# Altium PCB ProPrj_HTXStudio_OneHanded_Keyboard.PcbDoc (part 4 of 11)
Units mm, origin at the board's own origin, x right, y up, seen from the top; angles counter-clockwise.
Board outline 152.4 x 101.6 mm, 20 copper layers (F.Cu, F.Mask, B.Cu, B.Mask, In1.Cu, F.SilkS, In2.Cu, B.SilkS, F.Adhes, B.Adhes, F.Paste, B.Paste, Dwgs.User, Cmts.User, Eco1.User, Eco2.User, Edge.Cuts, Margin, B.CrtYd, F.CrtYd); 269 components, 0 nets, 747 pads, 1168 vias.
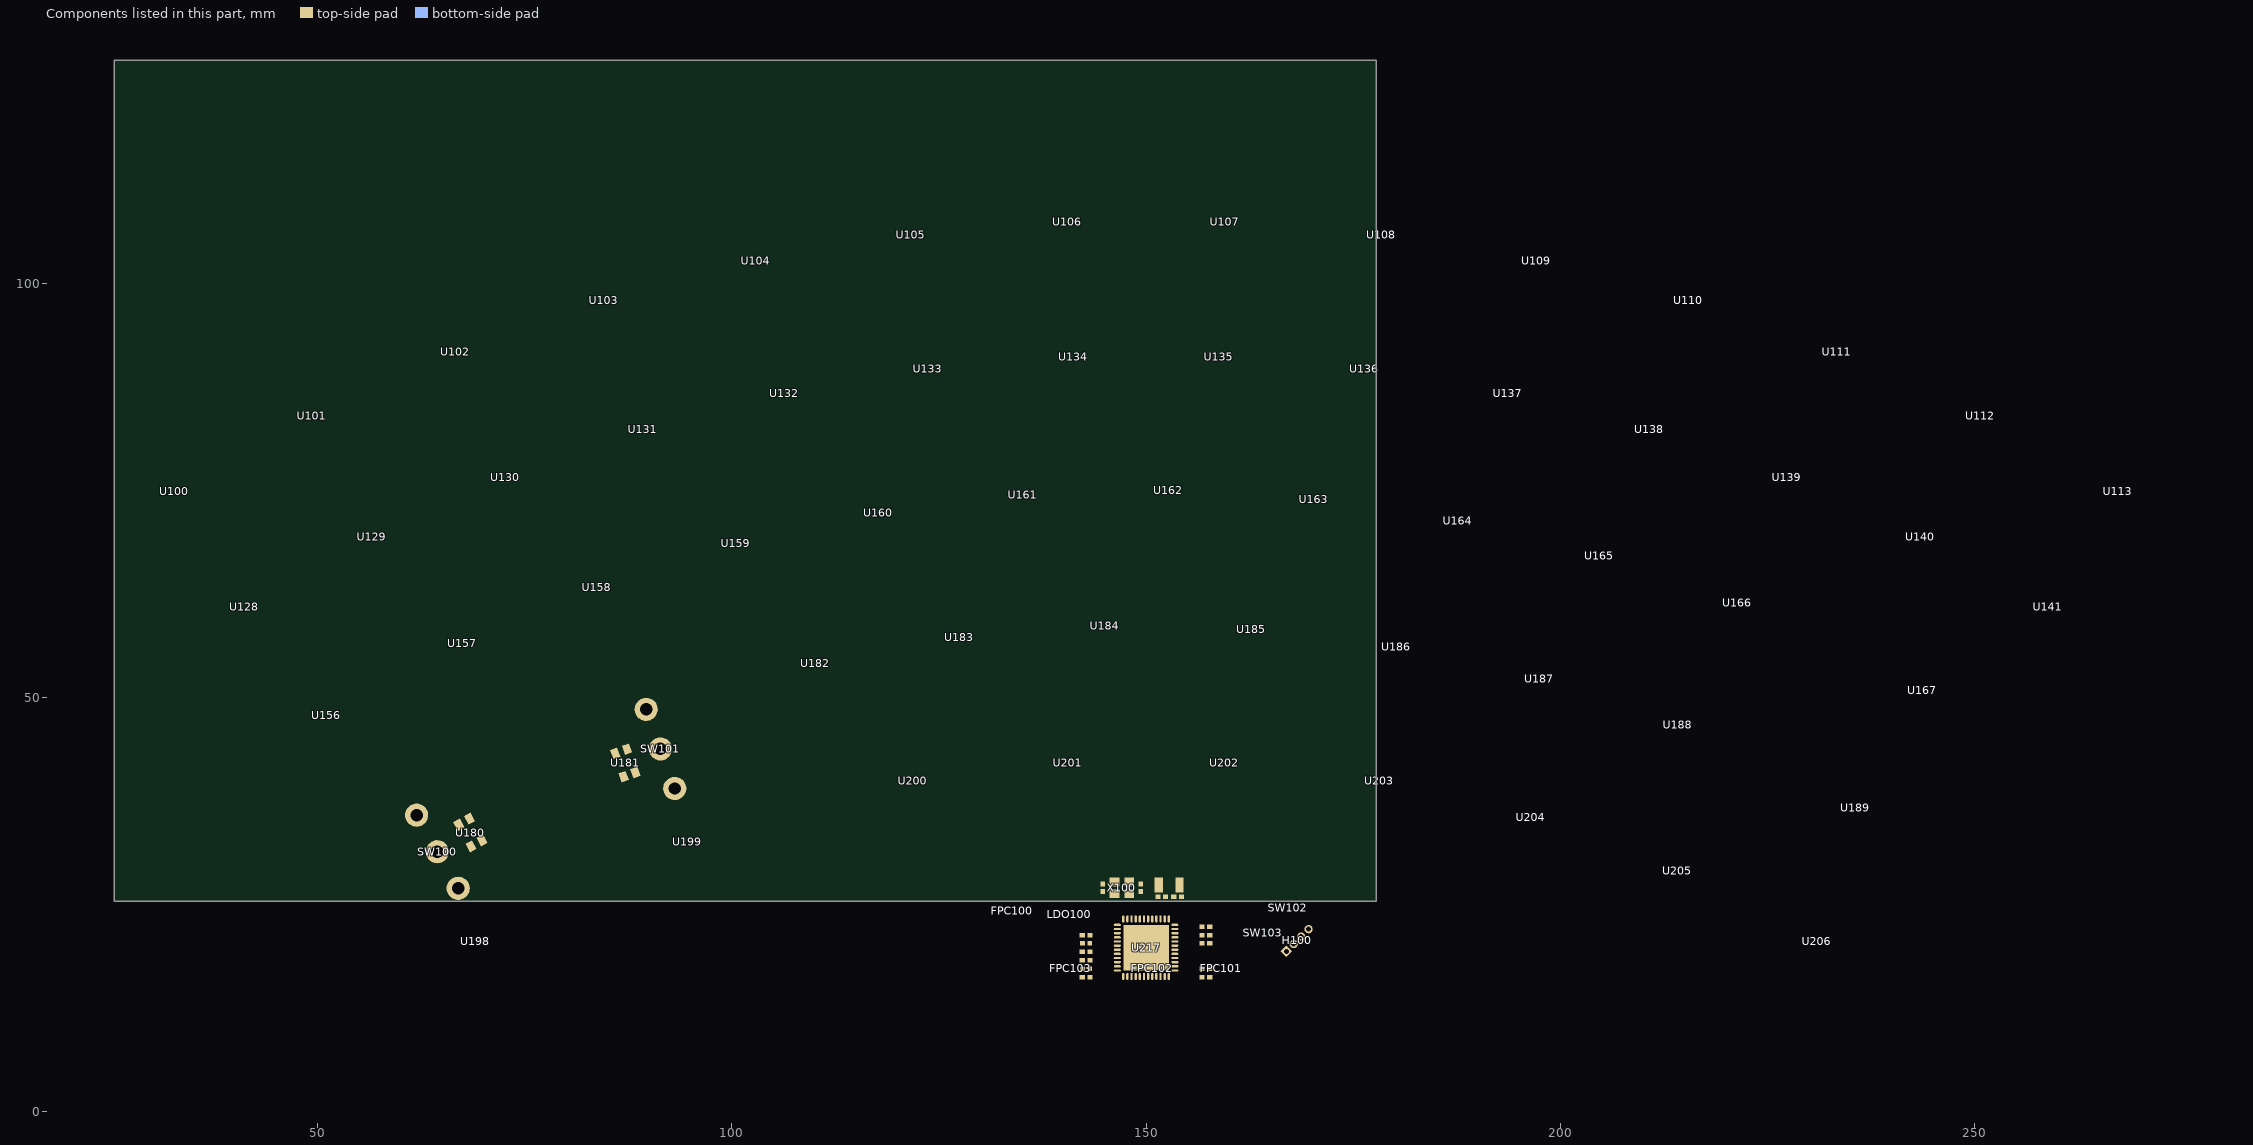
[diagram p16: the components of this part, seen from the top]

## Design rules (kind name [scope] priority, off if disabled: settings) (continued)
PolygonConnect Polygon_B.Cu--158_ConnectRelief90 [IsNamedPolygon('B.Cu--158') vs (IsThruPin or IsSMTPin) and (PadShape_AllLayers <> 'Round')] p600: connectstyle=Relief reliefconductorwidth=0.254 reliefentries=4 polygonreliefangle="90 Angle" airgapwidth=0.254
PolygonConnect Polygon_B.Cu--157_ConnectDirect [IsNamedPolygon('B.Cu--157') vs IsVia] p601: connectstyle=Direct reliefconductorwidth=0.254 reliefentries=4 polygonreliefangle="90 Angle" airgapwidth=0.254
PolygonConnect Polygon_B.Cu--157_ConnectRelief45 [IsNamedPolygon('B.Cu--157') vs (IsThruPin or IsSMTPin) and (PadShape_AllLayers = 'Round')] p602: connectstyle=Relief reliefconductorwidth=0.254 reliefentries=4 polygonreliefangle="45 Angle" airgapwidth=0.254
PolygonConnect Polygon_B.Cu--157_ConnectRelief90 [IsNamedPolygon('B.Cu--157') vs (IsThruPin or IsSMTPin) and (PadShape_AllLayers <> 'Round')] p603: connectstyle=Relief reliefconductorwidth=0.254 reliefentries=4 polygonreliefangle="90 Angle" airgapwidth=0.254
PolygonConnect Polygon_B.Cu--156_ConnectDirect [IsNamedPolygon('B.Cu--156') vs IsVia] p604: connectstyle=Direct reliefconductorwidth=0.254 reliefentries=4 polygonreliefangle="90 Angle" airgapwidth=0.254
PolygonConnect Polygon_B.Cu--156_ConnectRelief45 [IsNamedPolygon('B.Cu--156') vs (IsThruPin or IsSMTPin) and (PadShape_AllLayers = 'Round')] p605: connectstyle=Relief reliefconductorwidth=0.254 reliefentries=4 polygonreliefangle="45 Angle" airgapwidth=0.254
PolygonConnect Polygon_B.Cu--156_ConnectRelief90 [IsNamedPolygon('B.Cu--156') vs (IsThruPin or IsSMTPin) and (PadShape_AllLayers <> 'Round')] p606: connectstyle=Relief reliefconductorwidth=0.254 reliefentries=4 polygonreliefangle="90 Angle" airgapwidth=0.254
PolygonConnect Polygon_B.Cu--155_ConnectDirect [IsNamedPolygon('B.Cu--155') vs IsVia] p607: connectstyle=Direct reliefconductorwidth=0.254 reliefentries=4 polygonreliefangle="90 Angle" airgapwidth=0.254
PolygonConnect Polygon_B.Cu--155_ConnectRelief45 [IsNamedPolygon('B.Cu--155') vs (IsThruPin or IsSMTPin) and (PadShape_AllLayers = 'Round')] p608: connectstyle=Relief reliefconductorwidth=0.254 reliefentries=4 polygonreliefangle="45 Angle" airgapwidth=0.254
PolygonConnect Polygon_B.Cu--155_ConnectRelief90 [IsNamedPolygon('B.Cu--155') vs (IsThruPin or IsSMTPin) and (PadShape_AllLayers <> 'Round')] p609: connectstyle=Relief reliefconductorwidth=0.254 reliefentries=4 polygonreliefangle="90 Angle" airgapwidth=0.254
PolygonConnect Polygon_B.Cu--154_ConnectDirect [IsNamedPolygon('B.Cu--154') vs IsVia] p610: connectstyle=Direct reliefconductorwidth=0.254 reliefentries=4 polygonreliefangle="90 Angle" airgapwidth=0.254
PolygonConnect Polygon_B.Cu--154_ConnectRelief45 [IsNamedPolygon('B.Cu--154') vs (IsThruPin or IsSMTPin) and (PadShape_AllLayers = 'Round')] p611: connectstyle=Relief reliefconductorwidth=0.254 reliefentries=4 polygonreliefangle="45 Angle" airgapwidth=0.254
PolygonConnect Polygon_B.Cu--154_ConnectRelief90 [IsNamedPolygon('B.Cu--154') vs (IsThruPin or IsSMTPin) and (PadShape_AllLayers <> 'Round')] p612: connectstyle=Relief reliefconductorwidth=0.254 reliefentries=4 polygonreliefangle="90 Angle" airgapwidth=0.254
PolygonConnect Polygon_B.Cu--153_ConnectDirect [IsNamedPolygon('B.Cu--153') vs IsVia] p613: connectstyle=Direct reliefconductorwidth=0.254 reliefentries=4 polygonreliefangle="90 Angle" airgapwidth=0.254
PolygonConnect Polygon_B.Cu--153_ConnectRelief45 [IsNamedPolygon('B.Cu--153') vs (IsThruPin or IsSMTPin) and (PadShape_AllLayers = 'Round')] p614: connectstyle=Relief reliefconductorwidth=0.254 reliefentries=4 polygonreliefangle="45 Angle" airgapwidth=0.254
PolygonConnect Polygon_B.Cu--153_ConnectRelief90 [IsNamedPolygon('B.Cu--153') vs (IsThruPin or IsSMTPin) and (PadShape_AllLayers <> 'Round')] p615: connectstyle=Relief reliefconductorwidth=0.254 reliefentries=4 polygonreliefangle="90 Angle" airgapwidth=0.254
PolygonConnect Polygon_B.Cu--152_ConnectDirect [IsNamedPolygon('B.Cu--152') vs IsVia] p616: connectstyle=Direct reliefconductorwidth=0.254 reliefentries=4 polygonreliefangle="90 Angle" airgapwidth=0.254
PolygonConnect Polygon_B.Cu--152_ConnectRelief45 [IsNamedPolygon('B.Cu--152') vs (IsThruPin or IsSMTPin) and (PadShape_AllLayers = 'Round')] p617: connectstyle=Relief reliefconductorwidth=0.254 reliefentries=4 polygonreliefangle="45 Angle" airgapwidth=0.254
PolygonConnect Polygon_B.Cu--152_ConnectRelief90 [IsNamedPolygon('B.Cu--152') vs (IsThruPin or IsSMTPin) and (PadShape_AllLayers <> 'Round')] p618: connectstyle=Relief reliefconductorwidth=0.254 reliefentries=4 polygonreliefangle="90 Angle" airgapwidth=0.254
PolygonConnect Polygon_B.Cu--151_ConnectDirect [IsNamedPolygon('B.Cu--151') vs IsVia] p619: connectstyle=Direct reliefconductorwidth=0.254 reliefentries=4 polygonreliefangle="90 Angle" airgapwidth=0.254
PolygonConnect Polygon_B.Cu--151_ConnectRelief45 [IsNamedPolygon('B.Cu--151') vs (IsThruPin or IsSMTPin) and (PadShape_AllLayers = 'Round')] p620: connectstyle=Relief reliefconductorwidth=0.254 reliefentries=4 polygonreliefangle="45 Angle" airgapwidth=0.254
PolygonConnect Polygon_B.Cu--151_ConnectRelief90 [IsNamedPolygon('B.Cu--151') vs (IsThruPin or IsSMTPin) and (PadShape_AllLayers <> 'Round')] p621: connectstyle=Relief reliefconductorwidth=0.254 reliefentries=4 polygonreliefangle="90 Angle" airgapwidth=0.254
PolygonConnect Polygon_B.Cu--150_ConnectDirect [IsNamedPolygon('B.Cu--150') vs IsVia] p622: connectstyle=Direct reliefconductorwidth=0.254 reliefentries=4 polygonreliefangle="90 Angle" airgapwidth=0.254
PolygonConnect Polygon_B.Cu--150_ConnectRelief45 [IsNamedPolygon('B.Cu--150') vs (IsThruPin or IsSMTPin) and (PadShape_AllLayers = 'Round')] p623: connectstyle=Relief reliefconductorwidth=0.254 reliefentries=4 polygonreliefangle="45 Angle" airgapwidth=0.254
PolygonConnect Polygon_B.Cu--150_ConnectRelief90 [IsNamedPolygon('B.Cu--150') vs (IsThruPin or IsSMTPin) and (PadShape_AllLayers <> 'Round')] p624: connectstyle=Relief reliefconductorwidth=0.254 reliefentries=4 polygonreliefangle="90 Angle" airgapwidth=0.254
PolygonConnect Polygon_B.Cu--149_ConnectDirect [IsNamedPolygon('B.Cu--149') vs IsVia] p625: connectstyle=Direct reliefconductorwidth=0.254 reliefentries=4 polygonreliefangle="90 Angle" airgapwidth=0.254
PolygonConnect Polygon_B.Cu--149_ConnectRelief45 [IsNamedPolygon('B.Cu--149') vs (IsThruPin or IsSMTPin) and (PadShape_AllLayers = 'Round')] p626: connectstyle=Relief reliefconductorwidth=0.254 reliefentries=4 polygonreliefangle="45 Angle" airgapwidth=0.254
PolygonConnect Polygon_B.Cu--149_ConnectRelief90 [IsNamedPolygon('B.Cu--149') vs (IsThruPin or IsSMTPin) and (PadShape_AllLayers <> 'Round')] p627: connectstyle=Relief reliefconductorwidth=0.254 reliefentries=4 polygonreliefangle="90 Angle" airgapwidth=0.254
PolygonConnect Polygon_B.Cu--148_ConnectDirect [IsNamedPolygon('B.Cu--148') vs IsVia] p628: connectstyle=Direct reliefconductorwidth=0.254 reliefentries=4 polygonreliefangle="90 Angle" airgapwidth=0.254
PolygonConnect Polygon_B.Cu--148_ConnectRelief45 [IsNamedPolygon('B.Cu--148') vs (IsThruPin or IsSMTPin) and (PadShape_AllLayers = 'Round')] p629: connectstyle=Relief reliefconductorwidth=0.254 reliefentries=4 polygonreliefangle="45 Angle" airgapwidth=0.254
PolygonConnect Polygon_B.Cu--148_ConnectRelief90 [IsNamedPolygon('B.Cu--148') vs (IsThruPin or IsSMTPin) and (PadShape_AllLayers <> 'Round')] p630: connectstyle=Relief reliefconductorwidth=0.254 reliefentries=4 polygonreliefangle="90 Angle" airgapwidth=0.254
PolygonConnect Polygon_B.Cu--147_ConnectDirect [IsNamedPolygon('B.Cu--147') vs IsVia] p631: connectstyle=Direct reliefconductorwidth=0.254 reliefentries=4 polygonreliefangle="90 Angle" airgapwidth=0.254
PolygonConnect Polygon_B.Cu--147_ConnectRelief45 [IsNamedPolygon('B.Cu--147') vs (IsThruPin or IsSMTPin) and (PadShape_AllLayers = 'Round')] p632: connectstyle=Relief reliefconductorwidth=0.254 reliefentries=4 polygonreliefangle="45 Angle" airgapwidth=0.254
PolygonConnect Polygon_B.Cu--147_ConnectRelief90 [IsNamedPolygon('B.Cu--147') vs (IsThruPin or IsSMTPin) and (PadShape_AllLayers <> 'Round')] p633: connectstyle=Relief reliefconductorwidth=0.254 reliefentries=4 polygonreliefangle="90 Angle" airgapwidth=0.254
PolygonConnect Polygon_B.Cu--146_ConnectDirect [IsNamedPolygon('B.Cu--146') vs IsVia] p634: connectstyle=Direct reliefconductorwidth=0.254 reliefentries=4 polygonreliefangle="90 Angle" airgapwidth=0.254
PolygonConnect Polygon_B.Cu--146_ConnectRelief45 [IsNamedPolygon('B.Cu--146') vs (IsThruPin or IsSMTPin) and (PadShape_AllLayers = 'Round')] p635: connectstyle=Relief reliefconductorwidth=0.254 reliefentries=4 polygonreliefangle="45 Angle" airgapwidth=0.254
PolygonConnect Polygon_B.Cu--146_ConnectRelief90 [IsNamedPolygon('B.Cu--146') vs (IsThruPin or IsSMTPin) and (PadShape_AllLayers <> 'Round')] p636: connectstyle=Relief reliefconductorwidth=0.254 reliefentries=4 polygonreliefangle="90 Angle" airgapwidth=0.254
PolygonConnect Polygon_B.Cu--145_ConnectDirect [IsNamedPolygon('B.Cu--145') vs IsVia] p637: connectstyle=Direct reliefconductorwidth=0.254 reliefentries=4 polygonreliefangle="90 Angle" airgapwidth=0.254
PolygonConnect Polygon_B.Cu--145_ConnectRelief45 [IsNamedPolygon('B.Cu--145') vs (IsThruPin or IsSMTPin) and (PadShape_AllLayers = 'Round')] p638: connectstyle=Relief reliefconductorwidth=0.254 reliefentries=4 polygonreliefangle="45 Angle" airgapwidth=0.254
PolygonConnect Polygon_B.Cu--145_ConnectRelief90 [IsNamedPolygon('B.Cu--145') vs (IsThruPin or IsSMTPin) and (PadShape_AllLayers <> 'Round')] p639: connectstyle=Relief reliefconductorwidth=0.254 reliefentries=4 polygonreliefangle="90 Angle" airgapwidth=0.254
PolygonConnect Polygon_B.Cu--144_ConnectDirect [IsNamedPolygon('B.Cu--144') vs IsVia] p640: connectstyle=Direct reliefconductorwidth=0.254 reliefentries=4 polygonreliefangle="90 Angle" airgapwidth=0.254
PolygonConnect Polygon_B.Cu--144_ConnectRelief45 [IsNamedPolygon('B.Cu--144') vs (IsThruPin or IsSMTPin) and (PadShape_AllLayers = 'Round')] p641: connectstyle=Relief reliefconductorwidth=0.254 reliefentries=4 polygonreliefangle="45 Angle" airgapwidth=0.254
PolygonConnect Polygon_B.Cu--144_ConnectRelief90 [IsNamedPolygon('B.Cu--144') vs (IsThruPin or IsSMTPin) and (PadShape_AllLayers <> 'Round')] p642: connectstyle=Relief reliefconductorwidth=0.254 reliefentries=4 polygonreliefangle="90 Angle" airgapwidth=0.254
PolygonConnect Polygon_B.Cu--143_ConnectDirect [IsNamedPolygon('B.Cu--143') vs IsVia] p643: connectstyle=Direct reliefconductorwidth=0.254 reliefentries=4 polygonreliefangle="90 Angle" airgapwidth=0.254
PolygonConnect Polygon_B.Cu--143_ConnectRelief45 [IsNamedPolygon('B.Cu--143') vs (IsThruPin or IsSMTPin) and (PadShape_AllLayers = 'Round')] p644: connectstyle=Relief reliefconductorwidth=0.254 reliefentries=4 polygonreliefangle="45 Angle" airgapwidth=0.254
PolygonConnect Polygon_B.Cu--143_ConnectRelief90 [IsNamedPolygon('B.Cu--143') vs (IsThruPin or IsSMTPin) and (PadShape_AllLayers <> 'Round')] p645: connectstyle=Relief reliefconductorwidth=0.254 reliefentries=4 polygonreliefangle="90 Angle" airgapwidth=0.254
PolygonConnect Polygon_B.Cu--142_ConnectDirect [IsNamedPolygon('B.Cu--142') vs IsVia] p646: connectstyle=Direct reliefconductorwidth=0.254 reliefentries=4 polygonreliefangle="90 Angle" airgapwidth=0.254
PolygonConnect Polygon_B.Cu--142_ConnectRelief45 [IsNamedPolygon('B.Cu--142') vs (IsThruPin or IsSMTPin) and (PadShape_AllLayers = 'Round')] p647: connectstyle=Relief reliefconductorwidth=0.254 reliefentries=4 polygonreliefangle="45 Angle" airgapwidth=0.254
PolygonConnect Polygon_B.Cu--142_ConnectRelief90 [IsNamedPolygon('B.Cu--142') vs (IsThruPin or IsSMTPin) and (PadShape_AllLayers <> 'Round')] p648: connectstyle=Relief reliefconductorwidth=0.254 reliefentries=4 polygonreliefangle="90 Angle" airgapwidth=0.254
PolygonConnect Polygon_B.Cu--141_ConnectDirect [IsNamedPolygon('B.Cu--141') vs IsVia] p649: connectstyle=Direct reliefconductorwidth=0.254 reliefentries=4 polygonreliefangle="90 Angle" airgapwidth=0.254
PolygonConnect Polygon_B.Cu--141_ConnectRelief45 [IsNamedPolygon('B.Cu--141') vs (IsThruPin or IsSMTPin) and (PadShape_AllLayers = 'Round')] p650: connectstyle=Relief reliefconductorwidth=0.5 reliefentries=4 polygonreliefangle="45 Angle" airgapwidth=0.5
PolygonConnect Polygon_B.Cu--141_ConnectRelief90 [IsNamedPolygon('B.Cu--141') vs (IsThruPin or IsSMTPin) and (PadShape_AllLayers <> 'Round')] p651: connectstyle=Relief reliefconductorwidth=0.5 reliefentries=4 polygonreliefangle="90 Angle" airgapwidth=0.5
PolygonConnect Polygon_B.Cu--140_ConnectDirect [IsNamedPolygon('B.Cu--140') vs IsVia] p652: connectstyle=Direct reliefconductorwidth=0.254 reliefentries=4 polygonreliefangle="90 Angle" airgapwidth=0.254
PolygonConnect Polygon_B.Cu--140_ConnectRelief45 [IsNamedPolygon('B.Cu--140') vs (IsThruPin or IsSMTPin) and (PadShape_AllLayers = 'Round')] p653: connectstyle=Relief reliefconductorwidth=0.254 reliefentries=4 polygonreliefangle="45 Angle" airgapwidth=0.254
PolygonConnect Polygon_B.Cu--140_ConnectRelief90 [IsNamedPolygon('B.Cu--140') vs (IsThruPin or IsSMTPin) and (PadShape_AllLayers <> 'Round')] p654: connectstyle=Relief reliefconductorwidth=0.254 reliefentries=4 polygonreliefangle="90 Angle" airgapwidth=0.254
PolygonConnect Polygon_B.Cu--139_ConnectDirect [IsNamedPolygon('B.Cu--139') vs IsVia] p655: connectstyle=Direct reliefconductorwidth=0.254 reliefentries=4 polygonreliefangle="90 Angle" airgapwidth=0.254
PolygonConnect Polygon_B.Cu--139_ConnectRelief45 [IsNamedPolygon('B.Cu--139') vs (IsThruPin or IsSMTPin) and (PadShape_AllLayers = 'Round')] p656: connectstyle=Relief reliefconductorwidth=0.254 reliefentries=4 polygonreliefangle="45 Angle" airgapwidth=0.254
PolygonConnect Polygon_B.Cu--139_ConnectRelief90 [IsNamedPolygon('B.Cu--139') vs (IsThruPin or IsSMTPin) and (PadShape_AllLayers <> 'Round')] p657: connectstyle=Relief reliefconductorwidth=0.254 reliefentries=4 polygonreliefangle="90 Angle" airgapwidth=0.254
PolygonConnect Polygon_B.Cu--138_ConnectDirect [IsNamedPolygon('B.Cu--138') vs IsVia] p658: connectstyle=Direct reliefconductorwidth=0.254 reliefentries=4 polygonreliefangle="90 Angle" airgapwidth=0.254
PolygonConnect Polygon_B.Cu--138_ConnectRelief45 [IsNamedPolygon('B.Cu--138') vs (IsThruPin or IsSMTPin) and (PadShape_AllLayers = 'Round')] p659: connectstyle=Relief reliefconductorwidth=0.254 reliefentries=4 polygonreliefangle="45 Angle" airgapwidth=0.254
PolygonConnect Polygon_B.Cu--138_ConnectRelief90 [IsNamedPolygon('B.Cu--138') vs (IsThruPin or IsSMTPin) and (PadShape_AllLayers <> 'Round')] p660: connectstyle=Relief reliefconductorwidth=0.254 reliefentries=4 polygonreliefangle="90 Angle" airgapwidth=0.254
PolygonConnect Polygon_B.Cu--137_ConnectDirect [IsNamedPolygon('B.Cu--137') vs IsVia] p661: connectstyle=Direct reliefconductorwidth=0.254 reliefentries=4 polygonreliefangle="90 Angle" airgapwidth=0.254
PolygonConnect Polygon_B.Cu--137_ConnectRelief45 [IsNamedPolygon('B.Cu--137') vs (IsThruPin or IsSMTPin) and (PadShape_AllLayers = 'Round')] p662: connectstyle=Relief reliefconductorwidth=0.254 reliefentries=4 polygonreliefangle="45 Angle" airgapwidth=0.254
PolygonConnect Polygon_B.Cu--137_ConnectRelief90 [IsNamedPolygon('B.Cu--137') vs (IsThruPin or IsSMTPin) and (PadShape_AllLayers <> 'Round')] p663: connectstyle=Relief reliefconductorwidth=0.254 reliefentries=4 polygonreliefangle="90 Angle" airgapwidth=0.254
PolygonConnect Polygon_B.Cu--136_ConnectDirect [IsNamedPolygon('B.Cu--136') vs IsVia] p664: connectstyle=Direct reliefconductorwidth=0.254 reliefentries=4 polygonreliefangle="90 Angle" airgapwidth=0.254
PolygonConnect Polygon_B.Cu--136_ConnectRelief45 [IsNamedPolygon('B.Cu--136') vs (IsThruPin or IsSMTPin) and (PadShape_AllLayers = 'Round')] p665: connectstyle=Relief reliefconductorwidth=0.254 reliefentries=4 polygonreliefangle="45 Angle" airgapwidth=0.254
PolygonConnect Polygon_B.Cu--136_ConnectRelief90 [IsNamedPolygon('B.Cu--136') vs (IsThruPin or IsSMTPin) and (PadShape_AllLayers <> 'Round')] p666: connectstyle=Relief reliefconductorwidth=0.254 reliefentries=4 polygonreliefangle="90 Angle" airgapwidth=0.254
PolygonConnect Polygon_B.Cu--135_ConnectDirect [IsNamedPolygon('B.Cu--135') vs IsVia] p667: connectstyle=Direct reliefconductorwidth=0.254 reliefentries=4 polygonreliefangle="90 Angle" airgapwidth=0.254
PolygonConnect Polygon_B.Cu--135_ConnectRelief45 [IsNamedPolygon('B.Cu--135') vs (IsThruPin or IsSMTPin) and (PadShape_AllLayers = 'Round')] p668: connectstyle=Relief reliefconductorwidth=0.254 reliefentries=4 polygonreliefangle="45 Angle" airgapwidth=0.254
PolygonConnect Polygon_B.Cu--135_ConnectRelief90 [IsNamedPolygon('B.Cu--135') vs (IsThruPin or IsSMTPin) and (PadShape_AllLayers <> 'Round')] p669: connectstyle=Relief reliefconductorwidth=0.254 reliefentries=4 polygonreliefangle="90 Angle" airgapwidth=0.254
PolygonConnect Polygon_B.Cu--134_ConnectDirect [IsNamedPolygon('B.Cu--134') vs IsVia] p670: connectstyle=Direct reliefconductorwidth=0.254 reliefentries=4 polygonreliefangle="90 Angle" airgapwidth=0.254
PolygonConnect Polygon_B.Cu--134_ConnectRelief45 [IsNamedPolygon('B.Cu--134') vs (IsThruPin or IsSMTPin) and (PadShape_AllLayers = 'Round')] p671: connectstyle=Relief reliefconductorwidth=0.254 reliefentries=4 polygonreliefangle="45 Angle" airgapwidth=0.254
PolygonConnect Polygon_B.Cu--134_ConnectRelief90 [IsNamedPolygon('B.Cu--134') vs (IsThruPin or IsSMTPin) and (PadShape_AllLayers <> 'Round')] p672: connectstyle=Relief reliefconductorwidth=0.254 reliefentries=4 polygonreliefangle="90 Angle" airgapwidth=0.254
PolygonConnect Polygon_B.Cu--133_ConnectDirect [IsNamedPolygon('B.Cu--133') vs IsVia] p673: connectstyle=Direct reliefconductorwidth=0.254 reliefentries=4 polygonreliefangle="90 Angle" airgapwidth=0.254
PolygonConnect Polygon_B.Cu--133_ConnectRelief45 [IsNamedPolygon('B.Cu--133') vs (IsThruPin or IsSMTPin) and (PadShape_AllLayers = 'Round')] p674: connectstyle=Relief reliefconductorwidth=0.254 reliefentries=4 polygonreliefangle="45 Angle" airgapwidth=0.254
PolygonConnect Polygon_B.Cu--133_ConnectRelief90 [IsNamedPolygon('B.Cu--133') vs (IsThruPin or IsSMTPin) and (PadShape_AllLayers <> 'Round')] p675: connectstyle=Relief reliefconductorwidth=0.254 reliefentries=4 polygonreliefangle="90 Angle" airgapwidth=0.254
PolygonConnect Polygon_B.Cu--132_ConnectDirect [IsNamedPolygon('B.Cu--132') vs IsVia] p676: connectstyle=Direct reliefconductorwidth=0.254 reliefentries=4 polygonreliefangle="90 Angle" airgapwidth=0.254
PolygonConnect Polygon_B.Cu--132_ConnectRelief45 [IsNamedPolygon('B.Cu--132') vs (IsThruPin or IsSMTPin) and (PadShape_AllLayers = 'Round')] p677: connectstyle=Relief reliefconductorwidth=0.254 reliefentries=4 polygonreliefangle="45 Angle" airgapwidth=0.254
PolygonConnect Polygon_B.Cu--132_ConnectRelief90 [IsNamedPolygon('B.Cu--132') vs (IsThruPin or IsSMTPin) and (PadShape_AllLayers <> 'Round')] p678: connectstyle=Relief reliefconductorwidth=0.254 reliefentries=4 polygonreliefangle="90 Angle" airgapwidth=0.254
PolygonConnect Polygon_B.Cu--131_ConnectDirect [IsNamedPolygon('B.Cu--131') vs IsVia] p679: connectstyle=Direct reliefconductorwidth=0.254 reliefentries=4 polygonreliefangle="90 Angle" airgapwidth=0.254
PolygonConnect Polygon_B.Cu--131_ConnectRelief45 [IsNamedPolygon('B.Cu--131') vs (IsThruPin or IsSMTPin) and (PadShape_AllLayers = 'Round')] p680: connectstyle=Relief reliefconductorwidth=0.254 reliefentries=4 polygonreliefangle="45 Angle" airgapwidth=0.254
PolygonConnect Polygon_B.Cu--131_ConnectRelief90 [IsNamedPolygon('B.Cu--131') vs (IsThruPin or IsSMTPin) and (PadShape_AllLayers <> 'Round')] p681: connectstyle=Relief reliefconductorwidth=0.254 reliefentries=4 polygonreliefangle="90 Angle" airgapwidth=0.254
PolygonConnect Polygon_B.Cu--130_ConnectDirect [IsNamedPolygon('B.Cu--130') vs IsVia] p682: connectstyle=Direct reliefconductorwidth=0.254 reliefentries=4 polygonreliefangle="90 Angle" airgapwidth=0.254
PolygonConnect Polygon_B.Cu--130_ConnectRelief45 [IsNamedPolygon('B.Cu--130') vs (IsThruPin or IsSMTPin) and (PadShape_AllLayers = 'Round')] p683: connectstyle=Relief reliefconductorwidth=0.254 reliefentries=4 polygonreliefangle="45 Angle" airgapwidth=0.254
PolygonConnect Polygon_B.Cu--130_ConnectRelief90 [IsNamedPolygon('B.Cu--130') vs (IsThruPin or IsSMTPin) and (PadShape_AllLayers <> 'Round')] p684: connectstyle=Relief reliefconductorwidth=0.254 reliefentries=4 polygonreliefangle="90 Angle" airgapwidth=0.254
PolygonConnect Polygon_B.Cu--129_ConnectDirect [IsNamedPolygon('B.Cu--129') vs IsVia] p685: connectstyle=Direct reliefconductorwidth=0.254 reliefentries=4 polygonreliefangle="90 Angle" airgapwidth=0.254
PolygonConnect Polygon_B.Cu--129_ConnectRelief45 [IsNamedPolygon('B.Cu--129') vs (IsThruPin or IsSMTPin) and (PadShape_AllLayers = 'Round')] p686: connectstyle=Relief reliefconductorwidth=0.254 reliefentries=4 polygonreliefangle="45 Angle" airgapwidth=0.254
PolygonConnect Polygon_B.Cu--129_ConnectRelief90 [IsNamedPolygon('B.Cu--129') vs (IsThruPin or IsSMTPin) and (PadShape_AllLayers <> 'Round')] p687: connectstyle=Relief reliefconductorwidth=0.254 reliefentries=4 polygonreliefangle="90 Angle" airgapwidth=0.254
PolygonConnect Polygon_B.Cu--128_ConnectDirect [IsNamedPolygon('B.Cu--128') vs IsVia] p688: connectstyle=Direct reliefconductorwidth=0.254 reliefentries=4 polygonreliefangle="90 Angle" airgapwidth=0.254
PolygonConnect Polygon_B.Cu--128_ConnectRelief45 [IsNamedPolygon('B.Cu--128') vs (IsThruPin or IsSMTPin) and (PadShape_AllLayers = 'Round')] p689: connectstyle=Relief reliefconductorwidth=0.254 reliefentries=4 polygonreliefangle="45 Angle" airgapwidth=0.254
PolygonConnect Polygon_B.Cu--128_ConnectRelief90 [IsNamedPolygon('B.Cu--128') vs (IsThruPin or IsSMTPin) and (PadShape_AllLayers <> 'Round')] p690: connectstyle=Relief reliefconductorwidth=0.254 reliefentries=4 polygonreliefangle="90 Angle" airgapwidth=0.254
PolygonConnect Polygon_B.Cu--127_ConnectDirect [IsNamedPolygon('B.Cu--127') vs IsVia] p691: connectstyle=Direct reliefconductorwidth=0.254 reliefentries=4 polygonreliefangle="90 Angle" airgapwidth=0.254
PolygonConnect Polygon_B.Cu--127_ConnectRelief45 [IsNamedPolygon('B.Cu--127') vs (IsThruPin or IsSMTPin) and (PadShape_AllLayers = 'Round')] p692: connectstyle=Relief reliefconductorwidth=0.254 reliefentries=4 polygonreliefangle="45 Angle" airgapwidth=0.254
PolygonConnect Polygon_B.Cu--127_ConnectRelief90 [IsNamedPolygon('B.Cu--127') vs (IsThruPin or IsSMTPin) and (PadShape_AllLayers <> 'Round')] p693: connectstyle=Relief reliefconductorwidth=0.254 reliefentries=4 polygonreliefangle="90 Angle" airgapwidth=0.254
PolygonConnect Polygon_B.Cu--126_ConnectDirect [IsNamedPolygon('B.Cu--126') vs IsVia] p694: connectstyle=Direct reliefconductorwidth=0.254 reliefentries=4 polygonreliefangle="90 Angle" airgapwidth=0.254
PolygonConnect Polygon_B.Cu--126_ConnectRelief45 [IsNamedPolygon('B.Cu--126') vs (IsThruPin or IsSMTPin) and (PadShape_AllLayers = 'Round')] p695: connectstyle=Relief reliefconductorwidth=0.254 reliefentries=4 polygonreliefangle="45 Angle" airgapwidth=0.254
PolygonConnect Polygon_B.Cu--126_ConnectRelief90 [IsNamedPolygon('B.Cu--126') vs (IsThruPin or IsSMTPin) and (PadShape_AllLayers <> 'Round')] p696: connectstyle=Relief reliefconductorwidth=0.254 reliefentries=4 polygonreliefangle="90 Angle" airgapwidth=0.254
PolygonConnect Polygon_B.Cu--125_ConnectDirect [IsNamedPolygon('B.Cu--125') vs IsVia] p697: connectstyle=Direct reliefconductorwidth=0.254 reliefentries=4 polygonreliefangle="90 Angle" airgapwidth=0.254
PolygonConnect Polygon_B.Cu--125_ConnectRelief45 [IsNamedPolygon('B.Cu--125') vs (IsThruPin or IsSMTPin) and (PadShape_AllLayers = 'Round')] p698: connectstyle=Relief reliefconductorwidth=0.5 reliefentries=4 polygonreliefangle="45 Angle" airgapwidth=0.5
PolygonConnect Polygon_B.Cu--125_ConnectRelief90 [IsNamedPolygon('B.Cu--125') vs (IsThruPin or IsSMTPin) and (PadShape_AllLayers <> 'Round')] p699: connectstyle=Relief reliefconductorwidth=0.5 reliefentries=4 polygonreliefangle="90 Angle" airgapwidth=0.5
PolygonConnect Polygon_B.Cu--124_ConnectDirect [IsNamedPolygon('B.Cu--124') vs IsVia] p700: connectstyle=Direct reliefconductorwidth=0.254 reliefentries=4 polygonreliefangle="90 Angle" airgapwidth=0.254
PolygonConnect Polygon_B.Cu--124_ConnectRelief45 [IsNamedPolygon('B.Cu--124') vs (IsThruPin or IsSMTPin) and (PadShape_AllLayers = 'Round')] p701: connectstyle=Relief reliefconductorwidth=0.254 reliefentries=4 polygonreliefangle="45 Angle" airgapwidth=0.254
PolygonConnect Polygon_B.Cu--124_ConnectRelief90 [IsNamedPolygon('B.Cu--124') vs (IsThruPin or IsSMTPin) and (PadShape_AllLayers <> 'Round')] p702: connectstyle=Relief reliefconductorwidth=0.254 reliefentries=4 polygonreliefangle="90 Angle" airgapwidth=0.254
PolygonConnect Polygon_B.Cu--123_ConnectDirect [IsNamedPolygon('B.Cu--123') vs IsVia] p703: connectstyle=Direct reliefconductorwidth=0.254 reliefentries=4 polygonreliefangle="90 Angle" airgapwidth=0.254
PolygonConnect Polygon_B.Cu--123_ConnectRelief45 [IsNamedPolygon('B.Cu--123') vs (IsThruPin or IsSMTPin) and (PadShape_AllLayers = 'Round')] p704: connectstyle=Relief reliefconductorwidth=0.254 reliefentries=4 polygonreliefangle="45 Angle" airgapwidth=0.254
PolygonConnect Polygon_B.Cu--123_ConnectRelief90 [IsNamedPolygon('B.Cu--123') vs (IsThruPin or IsSMTPin) and (PadShape_AllLayers <> 'Round')] p705: connectstyle=Relief reliefconductorwidth=0.254 reliefentries=4 polygonreliefangle="90 Angle" airgapwidth=0.254
PolygonConnect Polygon_B.Cu--122_ConnectDirect [IsNamedPolygon('B.Cu--122') vs IsVia] p706: connectstyle=Direct reliefconductorwidth=0.254 reliefentries=4 polygonreliefangle="90 Angle" airgapwidth=0.254
PolygonConnect Polygon_B.Cu--122_ConnectRelief45 [IsNamedPolygon('B.Cu--122') vs (IsThruPin or IsSMTPin) and (PadShape_AllLayers = 'Round')] p707: connectstyle=Relief reliefconductorwidth=0.254 reliefentries=4 polygonreliefangle="45 Angle" airgapwidth=0.254
PolygonConnect Polygon_B.Cu--122_ConnectRelief90 [IsNamedPolygon('B.Cu--122') vs (IsThruPin or IsSMTPin) and (PadShape_AllLayers <> 'Round')] p708: connectstyle=Relief reliefconductorwidth=0.254 reliefentries=4 polygonreliefangle="90 Angle" airgapwidth=0.254
PolygonConnect Polygon_B.Cu--121_ConnectDirect [IsNamedPolygon('B.Cu--121') vs IsVia] p709: connectstyle=Direct reliefconductorwidth=0.254 reliefentries=4 polygonreliefangle="90 Angle" airgapwidth=0.254
PolygonConnect Polygon_B.Cu--121_ConnectRelief45 [IsNamedPolygon('B.Cu--121') vs (IsThruPin or IsSMTPin) and (PadShape_AllLayers = 'Round')] p710: connectstyle=Relief reliefconductorwidth=0.254 reliefentries=4 polygonreliefangle="45 Angle" airgapwidth=0.254
PolygonConnect Polygon_B.Cu--121_ConnectRelief90 [IsNamedPolygon('B.Cu--121') vs (IsThruPin or IsSMTPin) and (PadShape_AllLayers <> 'Round')] p711: connectstyle=Relief reliefconductorwidth=0.254 reliefentries=4 polygonreliefangle="90 Angle" airgapwidth=0.254
PolygonConnect Polygon_B.Cu--120_ConnectDirect [IsNamedPolygon('B.Cu--120') vs IsVia] p712: connectstyle=Direct reliefconductorwidth=0.254 reliefentries=4 polygonreliefangle="90 Angle" airgapwidth=0.254
PolygonConnect Polygon_B.Cu--120_ConnectRelief45 [IsNamedPolygon('B.Cu--120') vs (IsThruPin or IsSMTPin) and (PadShape_AllLayers = 'Round')] p713: connectstyle=Relief reliefconductorwidth=0.254 reliefentries=4 polygonreliefangle="45 Angle" airgapwidth=0.254
PolygonConnect Polygon_B.Cu--120_ConnectRelief90 [IsNamedPolygon('B.Cu--120') vs (IsThruPin or IsSMTPin) and (PadShape_AllLayers <> 'Round')] p714: connectstyle=Relief reliefconductorwidth=0.254 reliefentries=4 polygonreliefangle="90 Angle" airgapwidth=0.254
PolygonConnect Polygon_B.Cu--119_ConnectDirect [IsNamedPolygon('B.Cu--119') vs IsVia] p715: connectstyle=Direct reliefconductorwidth=0.254 reliefentries=4 polygonreliefangle="90 Angle" airgapwidth=0.254
PolygonConnect Polygon_B.Cu--119_ConnectRelief45 [IsNamedPolygon('B.Cu--119') vs (IsThruPin or IsSMTPin) and (PadShape_AllLayers = 'Round')] p716: connectstyle=Relief reliefconductorwidth=0.254 reliefentries=4 polygonreliefangle="45 Angle" airgapwidth=0.254
PolygonConnect Polygon_B.Cu--119_ConnectRelief90 [IsNamedPolygon('B.Cu--119') vs (IsThruPin or IsSMTPin) and (PadShape_AllLayers <> 'Round')] p717: connectstyle=Relief reliefconductorwidth=0.254 reliefentries=4 polygonreliefangle="90 Angle" airgapwidth=0.254
PolygonConnect Polygon_B.Cu--118_ConnectDirect [IsNamedPolygon('B.Cu--118') vs IsVia] p718: connectstyle=Direct reliefconductorwidth=0.254 reliefentries=4 polygonreliefangle="90 Angle" airgapwidth=0.254
PolygonConnect Polygon_B.Cu--118_ConnectRelief45 [IsNamedPolygon('B.Cu--118') vs (IsThruPin or IsSMTPin) and (PadShape_AllLayers = 'Round')] p719: connectstyle=Relief reliefconductorwidth=0.254 reliefentries=4 polygonreliefangle="45 Angle" airgapwidth=0.254
PolygonConnect Polygon_B.Cu--118_ConnectRelief90 [IsNamedPolygon('B.Cu--118') vs (IsThruPin or IsSMTPin) and (PadShape_AllLayers <> 'Round')] p720: connectstyle=Relief reliefconductorwidth=0.254 reliefentries=4 polygonreliefangle="90 Angle" airgapwidth=0.254
PolygonConnect Polygon_B.Cu--117_ConnectDirect [IsNamedPolygon('B.Cu--117') vs IsVia] p721: connectstyle=Direct reliefconductorwidth=0.254 reliefentries=4 polygonreliefangle="90 Angle" airgapwidth=0.254
PolygonConnect Polygon_B.Cu--117_ConnectRelief45 [IsNamedPolygon('B.Cu--117') vs (IsThruPin or IsSMTPin) and (PadShape_AllLayers = 'Round')] p722: connectstyle=Relief reliefconductorwidth=0.254 reliefentries=4 polygonreliefangle="45 Angle" airgapwidth=0.254
PolygonConnect Polygon_B.Cu--117_ConnectRelief90 [IsNamedPolygon('B.Cu--117') vs (IsThruPin or IsSMTPin) and (PadShape_AllLayers <> 'Round')] p723: connectstyle=Relief reliefconductorwidth=0.254 reliefentries=4 polygonreliefangle="90 Angle" airgapwidth=0.254
PolygonConnect Polygon_B.Cu--116_ConnectDirect [IsNamedPolygon('B.Cu--116') vs IsVia] p724: connectstyle=Direct reliefconductorwidth=0.254 reliefentries=4 polygonreliefangle="90 Angle" airgapwidth=0.254
PolygonConnect Polygon_B.Cu--116_ConnectRelief45 [IsNamedPolygon('B.Cu--116') vs (IsThruPin or IsSMTPin) and (PadShape_AllLayers = 'Round')] p725: connectstyle=Relief reliefconductorwidth=0.254 reliefentries=4 polygonreliefangle="45 Angle" airgapwidth=0.254
PolygonConnect Polygon_B.Cu--116_ConnectRelief90 [IsNamedPolygon('B.Cu--116') vs (IsThruPin or IsSMTPin) and (PadShape_AllLayers <> 'Round')] p726: connectstyle=Relief reliefconductorwidth=0.254 reliefentries=4 polygonreliefangle="90 Angle" airgapwidth=0.254
PolygonConnect Polygon_B.Cu--115_ConnectDirect [IsNamedPolygon('B.Cu--115') vs IsVia] p727: connectstyle=Direct reliefconductorwidth=0.254 reliefentries=4 polygonreliefangle="90 Angle" airgapwidth=0.254
PolygonConnect Polygon_B.Cu--115_ConnectRelief45 [IsNamedPolygon('B.Cu--115') vs (IsThruPin or IsSMTPin) and (PadShape_AllLayers = 'Round')] p728: connectstyle=Relief reliefconductorwidth=0.254 reliefentries=4 polygonreliefangle="45 Angle" airgapwidth=0.254
PolygonConnect Polygon_B.Cu--115_ConnectRelief90 [IsNamedPolygon('B.Cu--115') vs (IsThruPin or IsSMTPin) and (PadShape_AllLayers <> 'Round')] p729: connectstyle=Relief reliefconductorwidth=0.254 reliefentries=4 polygonreliefangle="90 Angle" airgapwidth=0.254
PolygonConnect Polygon_B.Cu--114_ConnectDirect [IsNamedPolygon('B.Cu--114') vs IsVia] p730: connectstyle=Direct reliefconductorwidth=0.254 reliefentries=4 polygonreliefangle="90 Angle" airgapwidth=0.254
PolygonConnect Polygon_B.Cu--114_ConnectRelief45 [IsNamedPolygon('B.Cu--114') vs (IsThruPin or IsSMTPin) and (PadShape_AllLayers = 'Round')] p731: connectstyle=Relief reliefconductorwidth=0.254 reliefentries=4 polygonreliefangle="45 Angle" airgapwidth=0.254
PolygonConnect Polygon_B.Cu--114_ConnectRelief90 [IsNamedPolygon('B.Cu--114') vs (IsThruPin or IsSMTPin) and (PadShape_AllLayers <> 'Round')] p732: connectstyle=Relief reliefconductorwidth=0.254 reliefentries=4 polygonreliefangle="90 Angle" airgapwidth=0.254
PolygonConnect Polygon_B.Cu--113_ConnectDirect [IsNamedPolygon('B.Cu--113') vs IsVia] p733: connectstyle=Direct reliefconductorwidth=0.254 reliefentries=4 polygonreliefangle="90 Angle" airgapwidth=0.254
PolygonConnect Polygon_B.Cu--113_ConnectRelief45 [IsNamedPolygon('B.Cu--113') vs (IsThruPin or IsSMTPin) and (PadShape_AllLayers = 'Round')] p734: connectstyle=Relief reliefconductorwidth=0.254 reliefentries=4 polygonreliefangle="45 Angle" airgapwidth=0.254
PolygonConnect Polygon_B.Cu--113_ConnectRelief90 [IsNamedPolygon('B.Cu--113') vs (IsThruPin or IsSMTPin) and (PadShape_AllLayers <> 'Round')] p735: connectstyle=Relief reliefconductorwidth=0.254 reliefentries=4 polygonreliefangle="90 Angle" airgapwidth=0.254
PolygonConnect Polygon_B.Cu--112_ConnectDirect [IsNamedPolygon('B.Cu--112') vs IsVia] p736: connectstyle=Direct reliefconductorwidth=0.254 reliefentries=4 polygonreliefangle="90 Angle" airgapwidth=0.254
PolygonConnect Polygon_B.Cu--112_ConnectRelief45 [IsNamedPolygon('B.Cu--112') vs (IsThruPin or IsSMTPin) and (PadShape_AllLayers = 'Round')] p737: connectstyle=Relief reliefconductorwidth=0.254 reliefentries=4 polygonreliefangle="45 Angle" airgapwidth=0.254
PolygonConnect Polygon_B.Cu--112_ConnectRelief90 [IsNamedPolygon('B.Cu--112') vs (IsThruPin or IsSMTPin) and (PadShape_AllLayers <> 'Round')] p738: connectstyle=Relief reliefconductorwidth=0.254 reliefentries=4 polygonreliefangle="90 Angle" airgapwidth=0.254
PolygonConnect Polygon_B.Cu--111_ConnectDirect [IsNamedPolygon('B.Cu--111') vs IsVia] p739: connectstyle=Direct reliefconductorwidth=0.254 reliefentries=4 polygonreliefangle="90 Angle" airgapwidth=0.254
PolygonConnect Polygon_B.Cu--111_ConnectRelief45 [IsNamedPolygon('B.Cu--111') vs (IsThruPin or IsSMTPin) and (PadShape_AllLayers = 'Round')] p740: connectstyle=Relief reliefconductorwidth=0.254 reliefentries=4 polygonreliefangle="45 Angle" airgapwidth=0.254
PolygonConnect Polygon_B.Cu--111_ConnectRelief90 [IsNamedPolygon('B.Cu--111') vs (IsThruPin or IsSMTPin) and (PadShape_AllLayers <> 'Round')] p741: connectstyle=Relief reliefconductorwidth=0.254 reliefentries=4 polygonreliefangle="90 Angle" airgapwidth=0.254
PolygonConnect Polygon_B.Cu--110_ConnectDirect [IsNamedPolygon('B.Cu--110') vs IsVia] p742: connectstyle=Direct reliefconductorwidth=0.254 reliefentries=4 polygonreliefangle="90 Angle" airgapwidth=0.254
PolygonConnect Polygon_B.Cu--110_ConnectRelief45 [IsNamedPolygon('B.Cu--110') vs (IsThruPin or IsSMTPin) and (PadShape_AllLayers = 'Round')] p743: connectstyle=Relief reliefconductorwidth=0.254 reliefentries=4 polygonreliefangle="45 Angle" airgapwidth=0.254
PolygonConnect Polygon_B.Cu--110_ConnectRelief90 [IsNamedPolygon('B.Cu--110') vs (IsThruPin or IsSMTPin) and (PadShape_AllLayers <> 'Round')] p744: connectstyle=Relief reliefconductorwidth=0.254 reliefentries=4 polygonreliefangle="90 Angle" airgapwidth=0.254
PolygonConnect Polygon_B.Cu--109_ConnectDirect [IsNamedPolygon('B.Cu--109') vs IsVia] p745: connectstyle=Direct reliefconductorwidth=0.254 reliefentries=4 polygonreliefangle="90 Angle" airgapwidth=0.254
PolygonConnect Polygon_B.Cu--109_ConnectRelief45 [IsNamedPolygon('B.Cu--109') vs (IsThruPin or IsSMTPin) and (PadShape_AllLayers = 'Round')] p746: connectstyle=Relief reliefconductorwidth=0.254 reliefentries=4 polygonreliefangle="45 Angle" airgapwidth=0.254
PolygonConnect Polygon_B.Cu--109_ConnectRelief90 [IsNamedPolygon('B.Cu--109') vs (IsThruPin or IsSMTPin) and (PadShape_AllLayers <> 'Round')] p747: connectstyle=Relief reliefconductorwidth=0.254 reliefentries=4 polygonreliefangle="90 Angle" airgapwidth=0.254
PolygonConnect Polygon_B.Cu--108_ConnectDirect [IsNamedPolygon('B.Cu--108') vs IsVia] p748: connectstyle=Direct reliefconductorwidth=0.254 reliefentries=4 polygonreliefangle="90 Angle" airgapwidth=0.254
PolygonConnect Polygon_B.Cu--108_ConnectRelief45 [IsNamedPolygon('B.Cu--108') vs (IsThruPin or IsSMTPin) and (PadShape_AllLayers = 'Round')] p749: connectstyle=Relief reliefconductorwidth=0.254 reliefentries=4 polygonreliefangle="45 Angle" airgapwidth=0.254
PolygonConnect Polygon_B.Cu--108_ConnectRelief90 [IsNamedPolygon('B.Cu--108') vs (IsThruPin or IsSMTPin) and (PadShape_AllLayers <> 'Round')] p750: connectstyle=Relief reliefconductorwidth=0.254 reliefentries=4 polygonreliefangle="90 Angle" airgapwidth=0.254
PolygonConnect Polygon_B.Cu--107_ConnectDirect [IsNamedPolygon('B.Cu--107') vs IsVia] p751: connectstyle=Direct reliefconductorwidth=0.254 reliefentries=4 polygonreliefangle="90 Angle" airgapwidth=0.254
PolygonConnect Polygon_B.Cu--107_ConnectRelief45 [IsNamedPolygon('B.Cu--107') vs (IsThruPin or IsSMTPin) and (PadShape_AllLayers = 'Round')] p752: connectstyle=Relief reliefconductorwidth=0.254 reliefentries=4 polygonreliefangle="45 Angle" airgapwidth=0.254
PolygonConnect Polygon_B.Cu--107_ConnectRelief90 [IsNamedPolygon('B.Cu--107') vs (IsThruPin or IsSMTPin) and (PadShape_AllLayers <> 'Round')] p753: connectstyle=Relief reliefconductorwidth=0.254 reliefentries=4 polygonreliefangle="90 Angle" airgapwidth=0.254
PolygonConnect Polygon_B.Cu--106_ConnectDirect [IsNamedPolygon('B.Cu--106') vs IsVia] p754: connectstyle=Direct reliefconductorwidth=0.254 reliefentries=4 polygonreliefangle="90 Angle" airgapwidth=0.254
PolygonConnect Polygon_B.Cu--106_ConnectRelief45 [IsNamedPolygon('B.Cu--106') vs (IsThruPin or IsSMTPin) and (PadShape_AllLayers = 'Round')] p755: connectstyle=Relief reliefconductorwidth=0.254 reliefentries=4 polygonreliefangle="45 Angle" airgapwidth=0.254
PolygonConnect Polygon_B.Cu--106_ConnectRelief90 [IsNamedPolygon('B.Cu--106') vs (IsThruPin or IsSMTPin) and (PadShape_AllLayers <> 'Round')] p756: connectstyle=Relief reliefconductorwidth=0.254 reliefentries=4 polygonreliefangle="90 Angle" airgapwidth=0.254
PolygonConnect Polygon_B.Cu--105_ConnectDirect [IsNamedPolygon('B.Cu--105') vs IsVia] p757: connectstyle=Direct reliefconductorwidth=0.254 reliefentries=4 polygonreliefangle="90 Angle" airgapwidth=0.254
PolygonConnect Polygon_B.Cu--105_ConnectRelief45 [IsNamedPolygon('B.Cu--105') vs (IsThruPin or IsSMTPin) and (PadShape_AllLayers = 'Round')] p758: connectstyle=Relief reliefconductorwidth=0.254 reliefentries=4 polygonreliefangle="45 Angle" airgapwidth=0.254
PolygonConnect Polygon_B.Cu--105_ConnectRelief90 [IsNamedPolygon('B.Cu--105') vs (IsThruPin or IsSMTPin) and (PadShape_AllLayers <> 'Round')] p759: connectstyle=Relief reliefconductorwidth=0.254 reliefentries=4 polygonreliefangle="90 Angle" airgapwidth=0.254
PolygonConnect Polygon_B.Cu--104_ConnectDirect [IsNamedPolygon('B.Cu--104') vs IsVia] p760: connectstyle=Direct reliefconductorwidth=0.254 reliefentries=4 polygonreliefangle="90 Angle" airgapwidth=0.254
PolygonConnect Polygon_B.Cu--104_ConnectRelief45 [IsNamedPolygon('B.Cu--104') vs (IsThruPin or IsSMTPin) and (PadShape_AllLayers = 'Round')] p761: connectstyle=Relief reliefconductorwidth=0.254 reliefentries=4 polygonreliefangle="45 Angle" airgapwidth=0.254
PolygonConnect Polygon_B.Cu--104_ConnectRelief90 [IsNamedPolygon('B.Cu--104') vs (IsThruPin or IsSMTPin) and (PadShape_AllLayers <> 'Round')] p762: connectstyle=Relief reliefconductorwidth=0.254 reliefentries=4 polygonreliefangle="90 Angle" airgapwidth=0.254
PolygonConnect Polygon_B.Cu--103_ConnectDirect [IsNamedPolygon('B.Cu--103') vs IsVia] p763: connectstyle=Direct reliefconductorwidth=0.254 reliefentries=4 polygonreliefangle="90 Angle" airgapwidth=0.254
PolygonConnect Polygon_B.Cu--103_ConnectRelief45 [IsNamedPolygon('B.Cu--103') vs (IsThruPin or IsSMTPin) and (PadShape_AllLayers = 'Round')] p764: connectstyle=Relief reliefconductorwidth=0.254 reliefentries=4 polygonreliefangle="45 Angle" airgapwidth=0.254
PolygonConnect Polygon_B.Cu--103_ConnectRelief90 [IsNamedPolygon('B.Cu--103') vs (IsThruPin or IsSMTPin) and (PadShape_AllLayers <> 'Round')] p765: connectstyle=Relief reliefconductorwidth=0.254 reliefentries=4 polygonreliefangle="90 Angle" airgapwidth=0.254
PolygonConnect Polygon_B.Cu--102_ConnectDirect [IsNamedPolygon('B.Cu--102') vs IsVia] p766: connectstyle=Direct reliefconductorwidth=0.254 reliefentries=4 polygonreliefangle="90 Angle" airgapwidth=0.254
PolygonConnect Polygon_B.Cu--102_ConnectRelief45 [IsNamedPolygon('B.Cu--102') vs (IsThruPin or IsSMTPin) and (PadShape_AllLayers = 'Round')] p767: connectstyle=Relief reliefconductorwidth=0.254 reliefentries=4 polygonreliefangle="45 Angle" airgapwidth=0.254
PolygonConnect Polygon_B.Cu--102_ConnectRelief90 [IsNamedPolygon('B.Cu--102') vs (IsThruPin or IsSMTPin) and (PadShape_AllLayers <> 'Round')] p768: connectstyle=Relief reliefconductorwidth=0.254 reliefentries=4 polygonreliefangle="90 Angle" airgapwidth=0.254
PolygonConnect Polygon_B.Cu--101_ConnectDirect [IsNamedPolygon('B.Cu--101') vs IsVia] p769: connectstyle=Direct reliefconductorwidth=0.254 reliefentries=4 polygonreliefangle="90 Angle" airgapwidth=0.254
PolygonConnect Polygon_B.Cu--101_ConnectRelief45 [IsNamedPolygon('B.Cu--101') vs (IsThruPin or IsSMTPin) and (PadShape_AllLayers = 'Round')] p770: connectstyle=Relief reliefconductorwidth=0.254 reliefentries=4 polygonreliefangle="45 Angle" airgapwidth=0.254
PolygonConnect Polygon_B.Cu--101_ConnectRelief90 [IsNamedPolygon('B.Cu--101') vs (IsThruPin or IsSMTPin) and (PadShape_AllLayers <> 'Round')] p771: connectstyle=Relief reliefconductorwidth=0.254 reliefentries=4 polygonreliefangle="90 Angle" airgapwidth=0.254
PolygonConnect Polygon_B.Cu--100_ConnectDirect [IsNamedPolygon('B.Cu--100') vs IsVia] p772: connectstyle=Direct reliefconductorwidth=0.254 reliefentries=4 polygonreliefangle="90 Angle" airgapwidth=0.254
PolygonConnect Polygon_B.Cu--100_ConnectRelief45 [IsNamedPolygon('B.Cu--100') vs (IsThruPin or IsSMTPin) and (PadShape_AllLayers = 'Round')] p773: connectstyle=Relief reliefconductorwidth=0.254 reliefentries=4 polygonreliefangle="45 Angle" airgapwidth=0.254
PolygonConnect Polygon_B.Cu--100_ConnectRelief90 [IsNamedPolygon('B.Cu--100') vs (IsThruPin or IsSMTPin) and (PadShape_AllLayers <> 'Round')] p774: connectstyle=Relief reliefconductorwidth=0.254 reliefentries=4 polygonreliefangle="90 Angle" airgapwidth=0.254
PolygonConnect Polygon_B.Cu--99_ConnectDirect [IsNamedPolygon('B.Cu--99') vs IsVia] p775: connectstyle=Direct reliefconductorwidth=0.254 reliefentries=4 polygonreliefangle="90 Angle" airgapwidth=0.254
PolygonConnect Polygon_B.Cu--99_ConnectRelief45 [IsNamedPolygon('B.Cu--99') vs (IsThruPin or IsSMTPin) and (PadShape_AllLayers = 'Round')] p776: connectstyle=Relief reliefconductorwidth=0.254 reliefentries=4 polygonreliefangle="45 Angle" airgapwidth=0.254
PolygonConnect Polygon_B.Cu--99_ConnectRelief90 [IsNamedPolygon('B.Cu--99') vs (IsThruPin or IsSMTPin) and (PadShape_AllLayers <> 'Round')] p777: connectstyle=Relief reliefconductorwidth=0.254 reliefentries=4 polygonreliefangle="90 Angle" airgapwidth=0.254
PolygonConnect Polygon_B.Cu--98_ConnectDirect [IsNamedPolygon('B.Cu--98') vs IsVia] p778: connectstyle=Direct reliefconductorwidth=0.254 reliefentries=4 polygonreliefangle="90 Angle" airgapwidth=0.254
PolygonConnect Polygon_B.Cu--98_ConnectRelief45 [IsNamedPolygon('B.Cu--98') vs (IsThruPin or IsSMTPin) and (PadShape_AllLayers = 'Round')] p779: connectstyle=Relief reliefconductorwidth=0.254 reliefentries=4 polygonreliefangle="45 Angle" airgapwidth=0.254
PolygonConnect Polygon_B.Cu--98_ConnectRelief90 [IsNamedPolygon('B.Cu--98') vs (IsThruPin or IsSMTPin) and (PadShape_AllLayers <> 'Round')] p780: connectstyle=Relief reliefconductorwidth=0.254 reliefentries=4 polygonreliefangle="90 Angle" airgapwidth=0.254
PolygonConnect Polygon_B.Cu--97_ConnectDirect [IsNamedPolygon('B.Cu--97') vs IsVia] p781: connectstyle=Direct reliefconductorwidth=0.254 reliefentries=4 polygonreliefangle="90 Angle" airgapwidth=0.254
PolygonConnect Polygon_B.Cu--97_ConnectRelief45 [IsNamedPolygon('B.Cu--97') vs (IsThruPin or IsSMTPin) and (PadShape_AllLayers = 'Round')] p782: connectstyle=Relief reliefconductorwidth=0.254 reliefentries=4 polygonreliefangle="45 Angle" airgapwidth=0.254
PolygonConnect Polygon_B.Cu--97_ConnectRelief90 [IsNamedPolygon('B.Cu--97') vs (IsThruPin or IsSMTPin) and (PadShape_AllLayers <> 'Round')] p783: connectstyle=Relief reliefconductorwidth=0.254 reliefentries=4 polygonreliefangle="90 Angle" airgapwidth=0.254
PolygonConnect Polygon_B.Cu--96_ConnectDirect [IsNamedPolygon('B.Cu--96') vs IsVia] p784: connectstyle=Direct reliefconductorwidth=0.254 reliefentries=4 polygonreliefangle="90 Angle" airgapwidth=0.254
PolygonConnect Polygon_B.Cu--96_ConnectRelief45 [IsNamedPolygon('B.Cu--96') vs (IsThruPin or IsSMTPin) and (PadShape_AllLayers = 'Round')] p785: connectstyle=Relief reliefconductorwidth=0.254 reliefentries=4 polygonreliefangle="45 Angle" airgapwidth=0.254
PolygonConnect Polygon_B.Cu--96_ConnectRelief90 [IsNamedPolygon('B.Cu--96') vs (IsThruPin or IsSMTPin) and (PadShape_AllLayers <> 'Round')] p786: connectstyle=Relief reliefconductorwidth=0.254 reliefentries=4 polygonreliefangle="90 Angle" airgapwidth=0.254
PolygonConnect Polygon_B.Cu--95_ConnectDirect [IsNamedPolygon('B.Cu--95') vs IsVia] p787: connectstyle=Direct reliefconductorwidth=0.254 reliefentries=4 polygonreliefangle="90 Angle" airgapwidth=0.254
PolygonConnect Polygon_B.Cu--95_ConnectRelief45 [IsNamedPolygon('B.Cu--95') vs (IsThruPin or IsSMTPin) and (PadShape_AllLayers = 'Round')] p788: connectstyle=Relief reliefconductorwidth=0.254 reliefentries=4 polygonreliefangle="45 Angle" airgapwidth=0.254
PolygonConnect Polygon_B.Cu--95_ConnectRelief90 [IsNamedPolygon('B.Cu--95') vs (IsThruPin or IsSMTPin) and (PadShape_AllLayers <> 'Round')] p789: connectstyle=Relief reliefconductorwidth=0.254 reliefentries=4 polygonreliefangle="90 Angle" airgapwidth=0.254
PolygonConnect Polygon_B.Cu--94_ConnectDirect [IsNamedPolygon('B.Cu--94') vs IsVia] p790: connectstyle=Direct reliefconductorwidth=0.254 reliefentries=4 polygonreliefangle="90 Angle" airgapwidth=0.254
PolygonConnect Polygon_B.Cu--94_ConnectRelief45 [IsNamedPolygon('B.Cu--94') vs (IsThruPin or IsSMTPin) and (PadShape_AllLayers = 'Round')] p791: connectstyle=Relief reliefconductorwidth=0.254 reliefentries=4 polygonreliefangle="45 Angle" airgapwidth=0.254
PolygonConnect Polygon_B.Cu--94_ConnectRelief90 [IsNamedPolygon('B.Cu--94') vs (IsThruPin or IsSMTPin) and (PadShape_AllLayers <> 'Round')] p792: connectstyle=Relief reliefconductorwidth=0.254 reliefentries=4 polygonreliefangle="90 Angle" airgapwidth=0.254
PolygonConnect Polygon_B.Cu--93_ConnectDirect [IsNamedPolygon('B.Cu--93') vs IsVia] p793: connectstyle=Direct reliefconductorwidth=0.254 reliefentries=4 polygonreliefangle="90 Angle" airgapwidth=0.254
PolygonConnect Polygon_B.Cu--93_ConnectRelief45 [IsNamedPolygon('B.Cu--93') vs (IsThruPin or IsSMTPin) and (PadShape_AllLayers = 'Round')] p794: connectstyle=Relief reliefconductorwidth=0.254 reliefentries=4 polygonreliefangle="45 Angle" airgapwidth=0.254
PolygonConnect Polygon_B.Cu--93_ConnectRelief90 [IsNamedPolygon('B.Cu--93') vs (IsThruPin or IsSMTPin) and (PadShape_AllLayers <> 'Round')] p795: connectstyle=Relief reliefconductorwidth=0.254 reliefentries=4 polygonreliefangle="90 Angle" airgapwidth=0.254
PolygonConnect Polygon_B.Cu--92_ConnectDirect [IsNamedPolygon('B.Cu--92') vs IsVia] p796: connectstyle=Direct reliefconductorwidth=0.254 reliefentries=4 polygonreliefangle="90 Angle" airgapwidth=0.254
PolygonConnect Polygon_B.Cu--92_ConnectRelief45 [IsNamedPolygon('B.Cu--92') vs (IsThruPin or IsSMTPin) and (PadShape_AllLayers = 'Round')] p797: connectstyle=Relief reliefconductorwidth=0.254 reliefentries=4 polygonreliefangle="45 Angle" airgapwidth=0.254
PolygonConnect Polygon_B.Cu--92_ConnectRelief90 [IsNamedPolygon('B.Cu--92') vs (IsThruPin or IsSMTPin) and (PadShape_AllLayers <> 'Round')] p798: connectstyle=Relief reliefconductorwidth=0.254 reliefentries=4 polygonreliefangle="90 Angle" airgapwidth=0.254
PolygonConnect Polygon_B.Cu--91_ConnectDirect [IsNamedPolygon('B.Cu--91') vs IsVia] p799: connectstyle=Direct reliefconductorwidth=0.254 reliefentries=4 polygonreliefangle="90 Angle" airgapwidth=0.254
PolygonConnect Polygon_B.Cu--91_ConnectRelief45 [IsNamedPolygon('B.Cu--91') vs (IsThruPin or IsSMTPin) and (PadShape_AllLayers = 'Round')] p800: connectstyle=Relief reliefconductorwidth=0.254 reliefentries=4 polygonreliefangle="45 Angle" airgapwidth=0.254
PolygonConnect Polygon_B.Cu--91_ConnectRelief90 [IsNamedPolygon('B.Cu--91') vs (IsThruPin or IsSMTPin) and (PadShape_AllLayers <> 'Round')] p801: connectstyle=Relief reliefconductorwidth=0.254 reliefentries=4 polygonreliefangle="90 Angle" airgapwidth=0.254
PolygonConnect Polygon_B.Cu--90_ConnectDirect [IsNamedPolygon('B.Cu--90') vs IsVia] p802: connectstyle=Direct reliefconductorwidth=0.254 reliefentries=4 polygonreliefangle="90 Angle" airgapwidth=0.254
PolygonConnect Polygon_B.Cu--90_ConnectRelief45 [IsNamedPolygon('B.Cu--90') vs (IsThruPin or IsSMTPin) and (PadShape_AllLayers = 'Round')] p803: connectstyle=Relief reliefconductorwidth=0.254 reliefentries=4 polygonreliefangle="45 Angle" airgapwidth=0.254